# Altium PCB PCB-BL-2.PcbDoc
Units mil, origin at the board's own origin, x right, y up, seen from the top; angles counter-clockwise.
Board outline 3325 x 3850 mil, 4 copper layers (Top Layer, GND Plane 1, GND Plane 2, Bottom Layer), stack 23.756 mil thick; 49 components, 54 nets, 212 pads, 33 vias.
Unrouted connection lines stored in the file: 39.
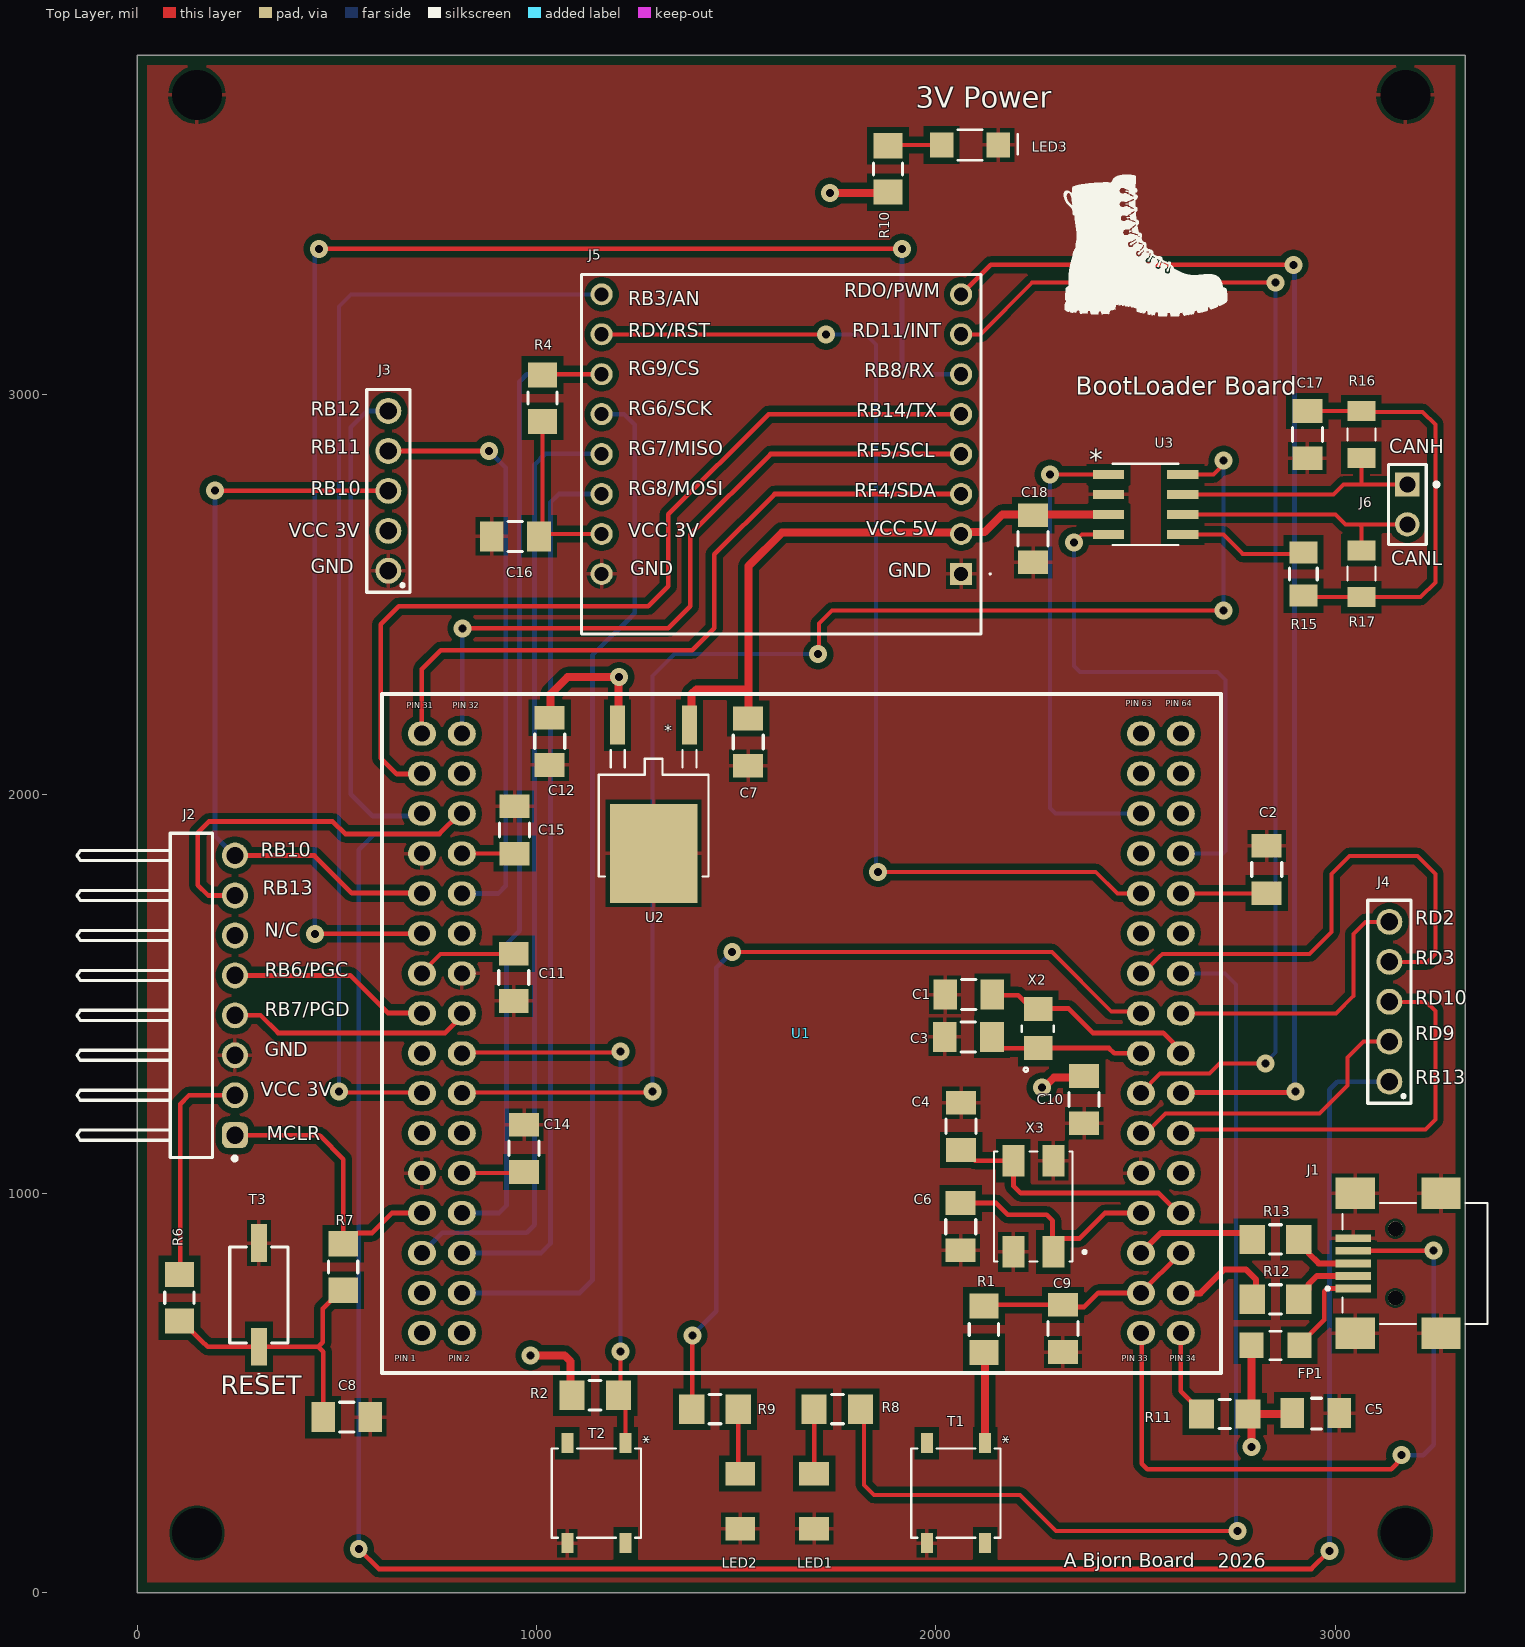
[diagram p0: Top Layer view]
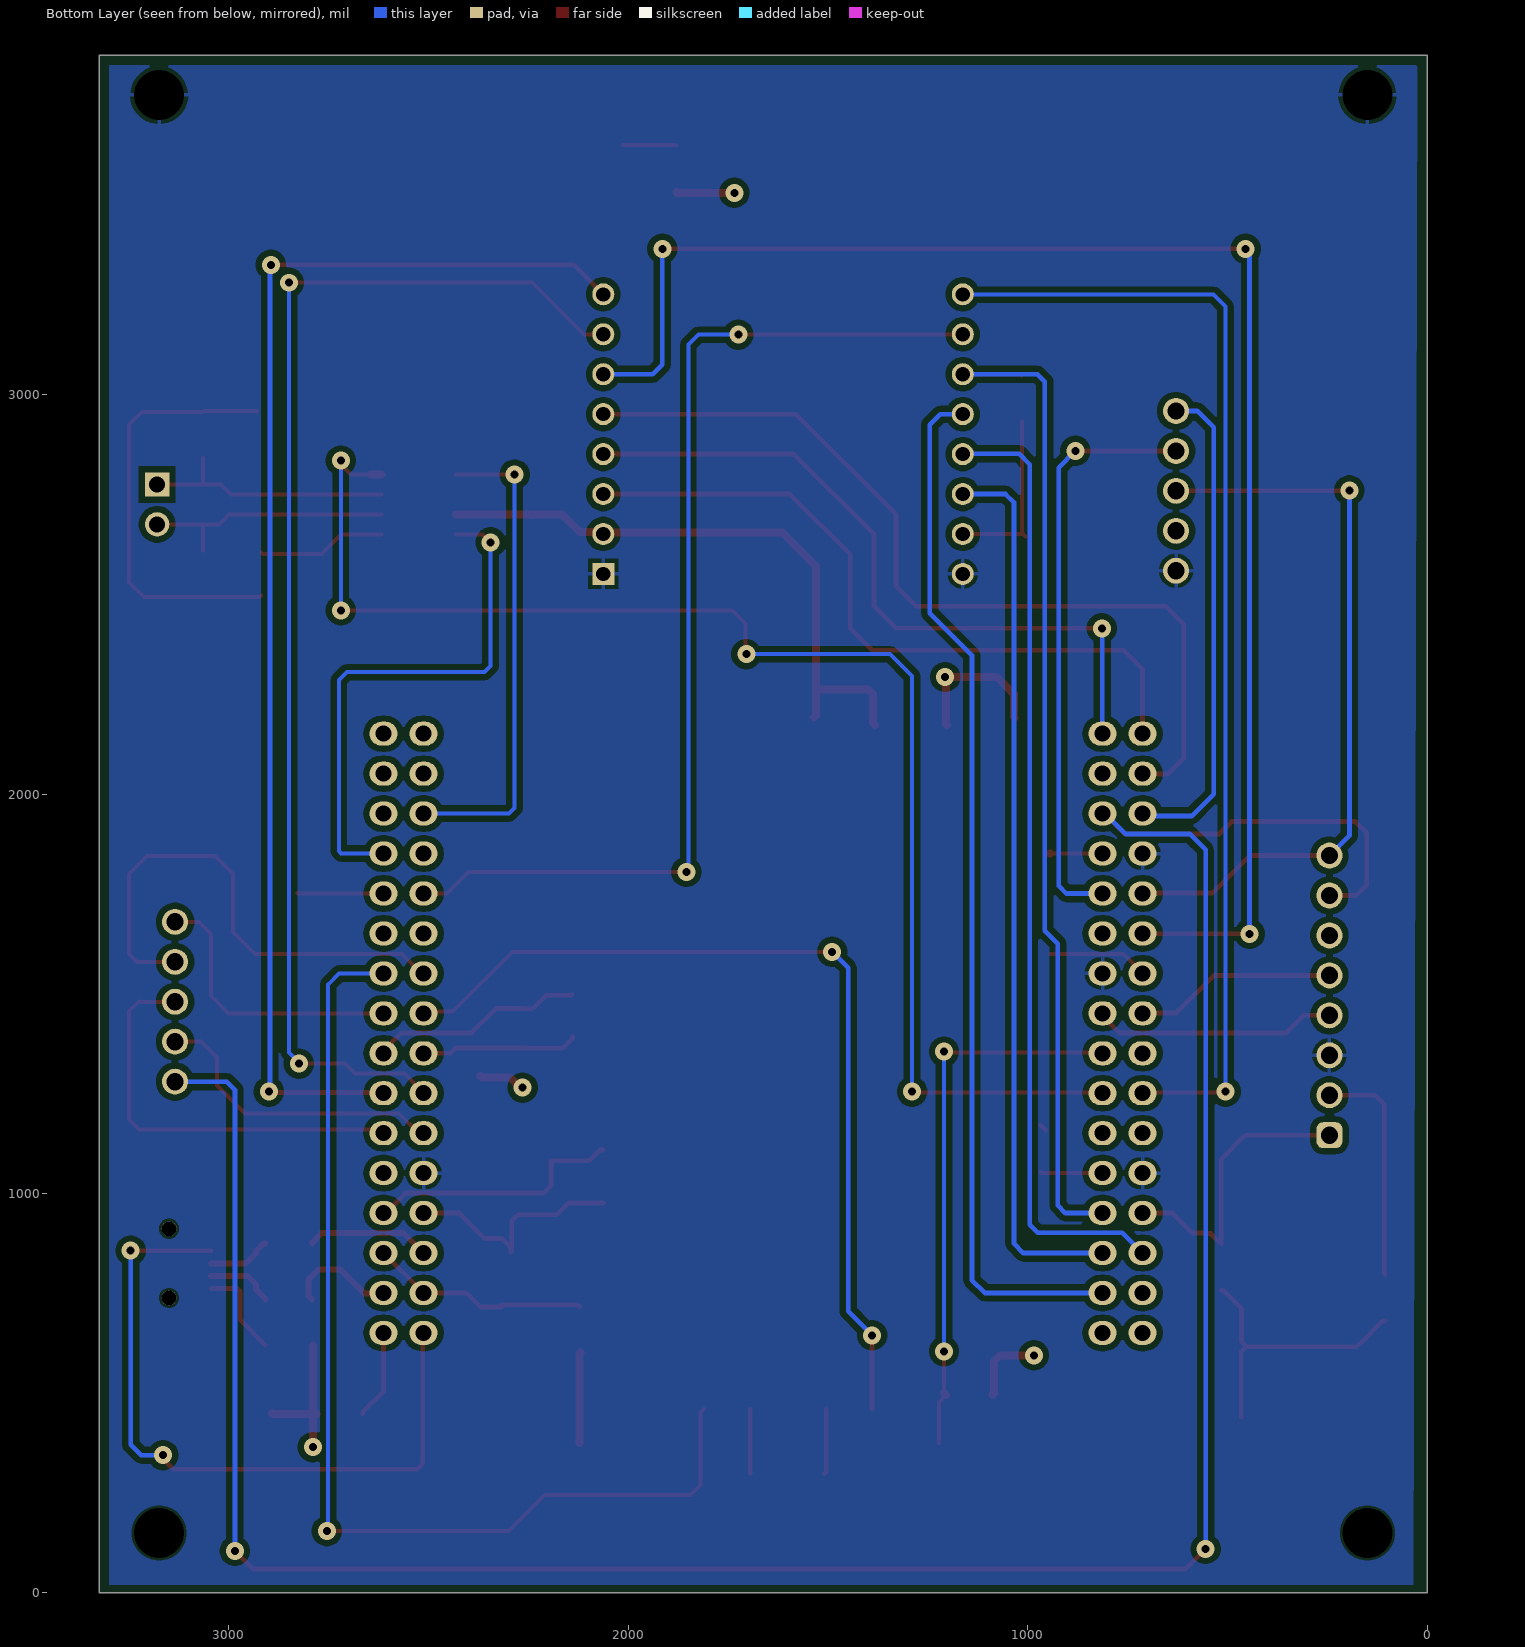
[diagram p1: Bottom Layer view, seen from below]
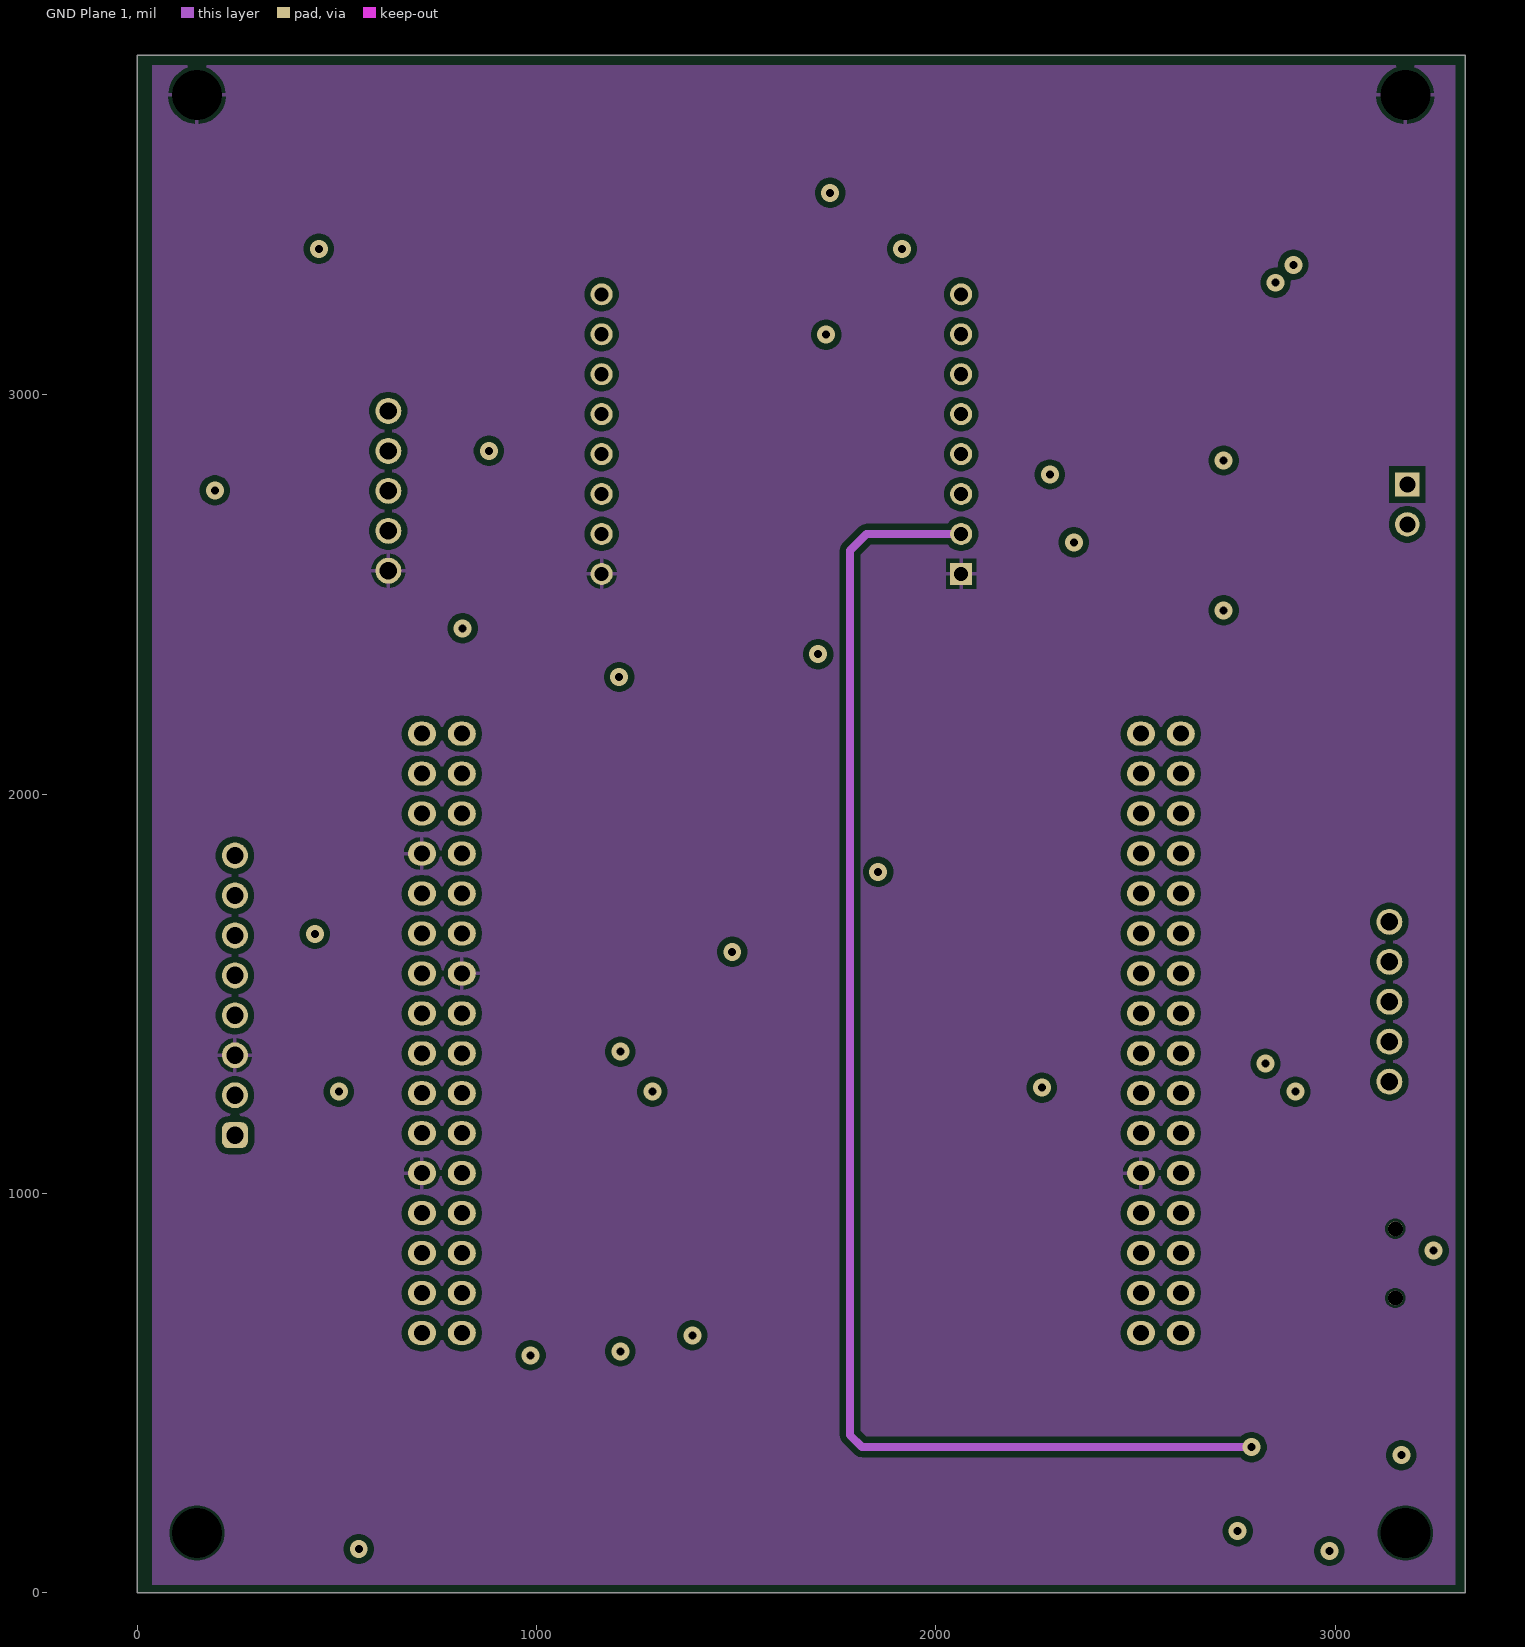
[diagram p2: GND Plane 1]
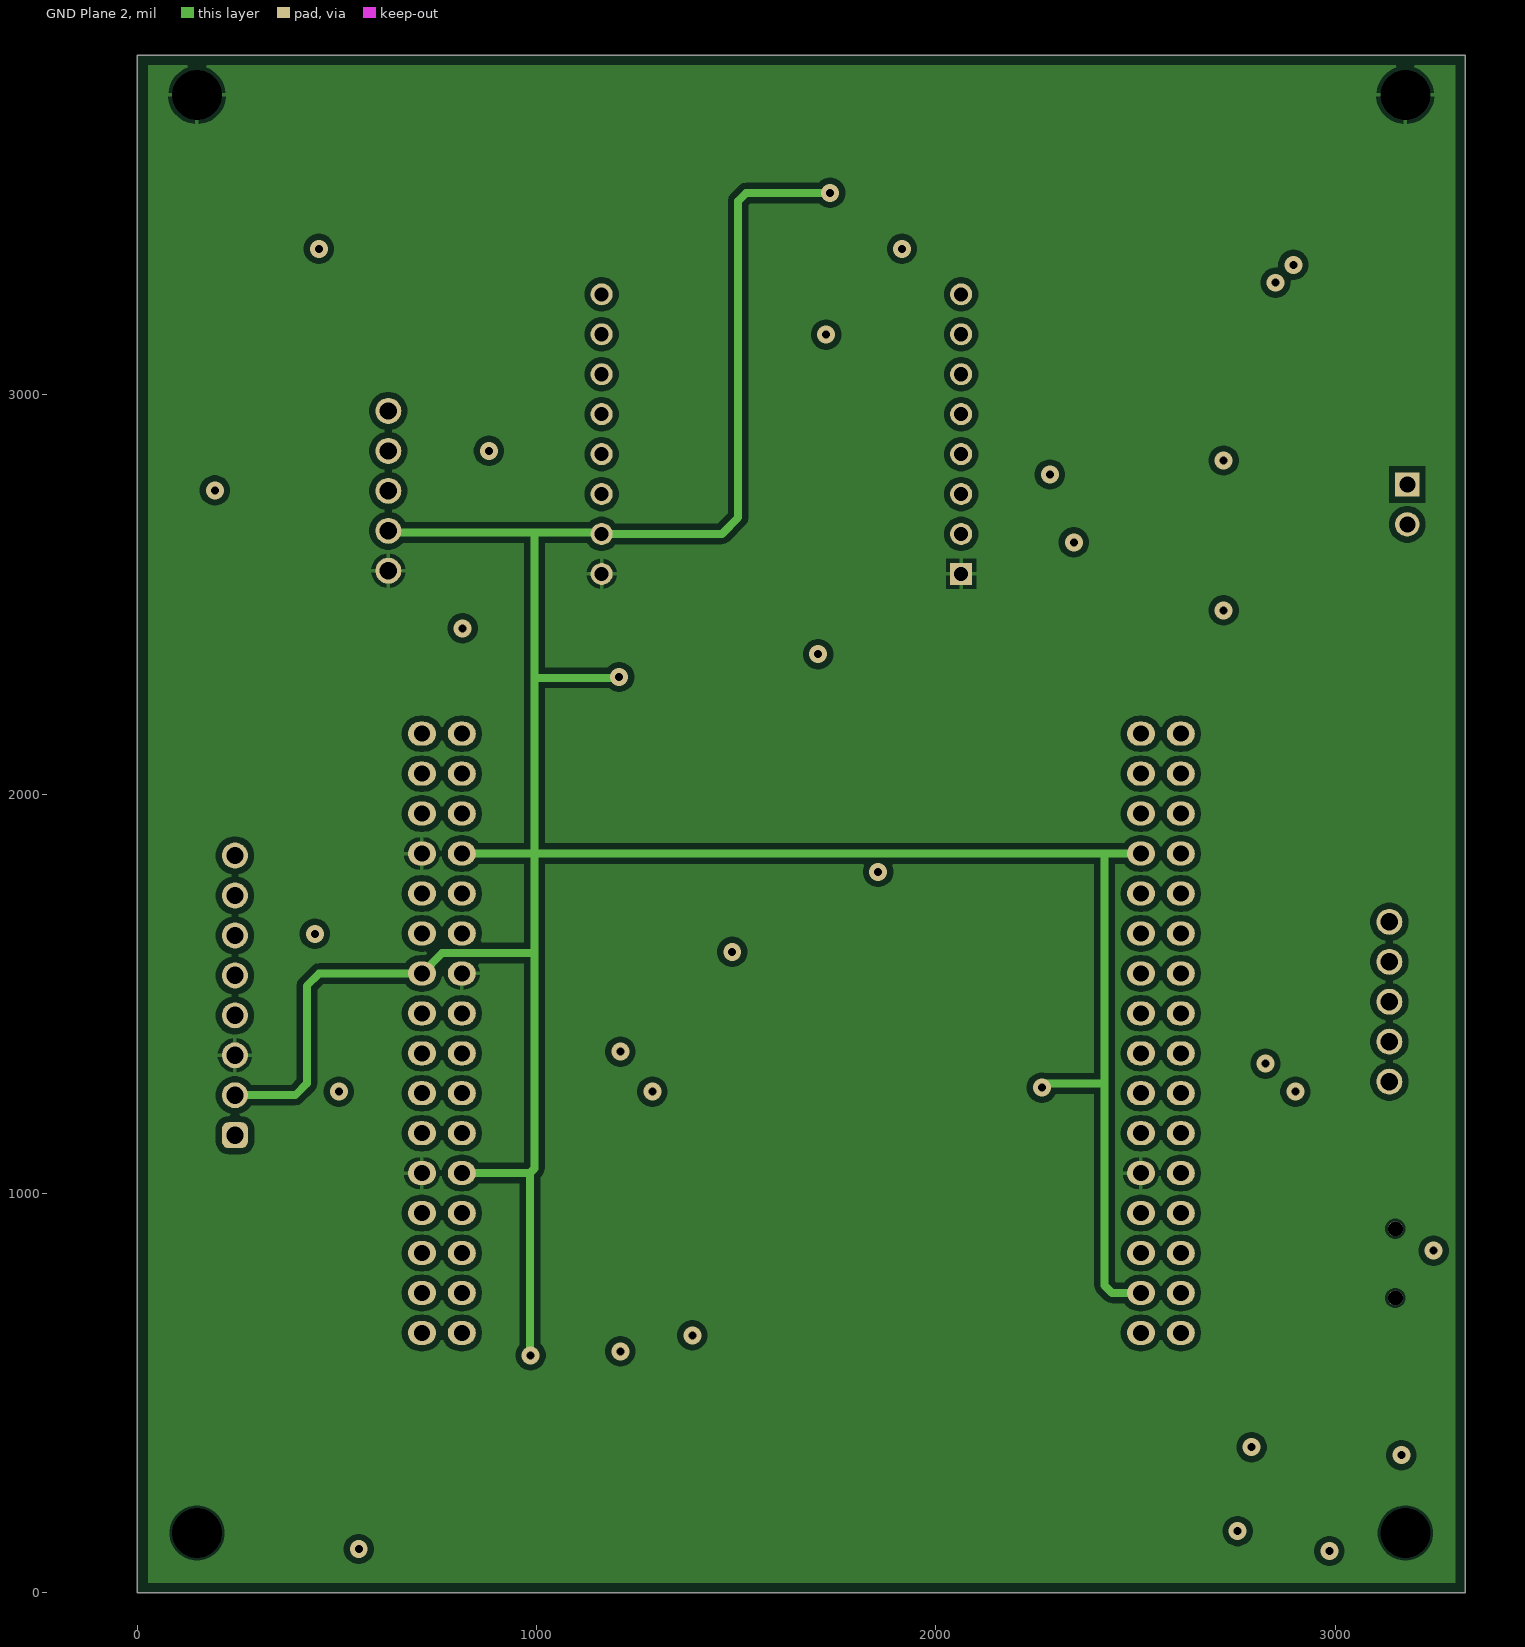
[diagram p3: GND Plane 2]
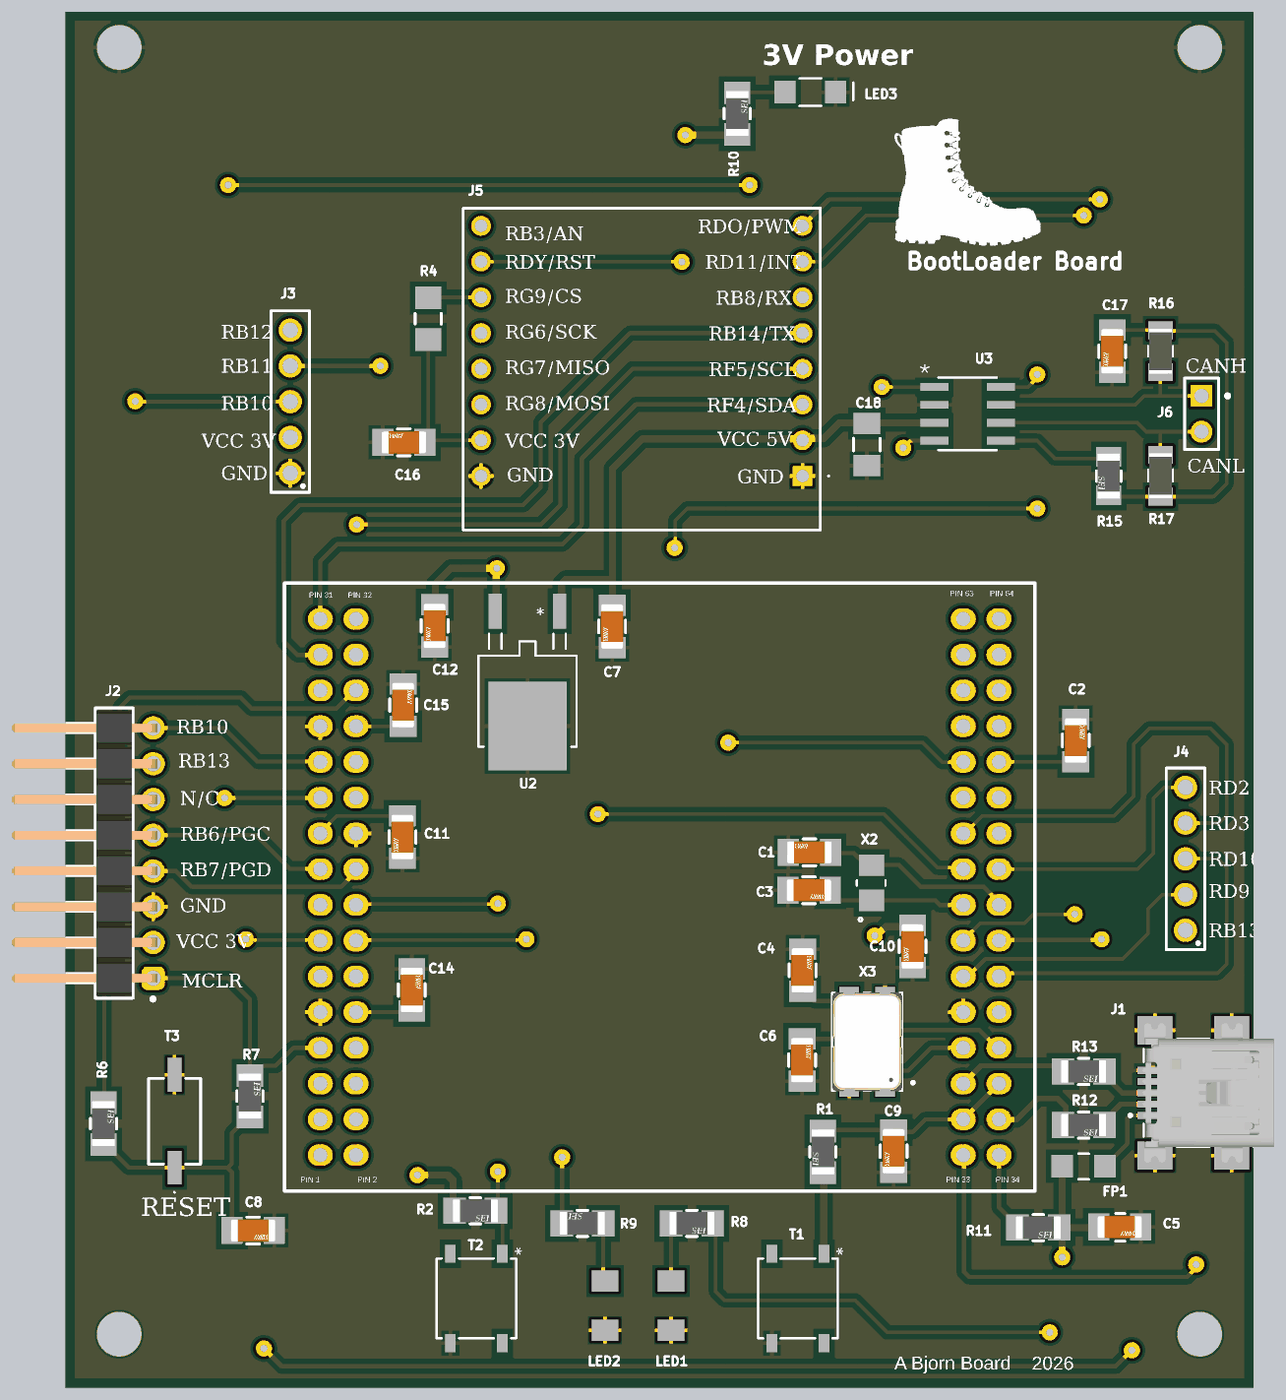
[diagram p4: 3D render of the assembled board from above, using the file's embedded part models]

## Layer stack, top to bottom
Top Solder: solder mask 0.4, Solder Resist, Dk 3.5
Top Layer: signal copper 1.4
Dielectric 2: prepreg 2.8, PP-006, Dk 4.1
GND Plane 1: signal copper 1.378
Dielectric 1: dielectric 12.6, FR-4, Dk 4.8
GND Plane 2: signal copper 1.378
Dielectric 3: prepreg 2.8, PP-006, Dk 4.1
Bottom Layer: signal copper 1.4
Bottom Solder: solder mask 0.4, Solder Resist, Dk 3.5

## Board outline
0,0 0,3850 3325,3850 3325,0

## Design rules (kind name [scope] priority, off if disabled: settings)
Clearance [All] p1: gap=6 ignorepadtopadclearanceinfootprint=FALSE except(8: Arc-SMDPad Track-SMDPad SMDPad-SMDPad; 15: Arc-Fill Arc-Poly Arc-Region Track-Fill Track-Poly Track-Region SMDPad-Fill SMDPad-Poly SMDPad-Region THPad-Fill THPad-Poly THPad-Region Via-Fill Via-Poly Via-Region Fill-Fill Fill-Poly Fill-Region Poly-Poly Poly-Region Region-Region)
DiffPairsRouting [All] p1: maxlimit=10 minlimit=10 mostfreqgap=10 toplayer_minwidth=15 toplayer_maxwidth=15 toplayer_prefwidth=15 midlayer1_minwidth=15 midlayer1_maxwidth=15 midlayer1_prefwidth=15 midlayer2_minwidth=15 midlayer2_maxwidth=15 midlayer2_prefwidth=15 bottomlayer_minwidth=15 bottomlayer_maxwidth=15 bottomlayer_prefwidth=15 maxuncoupledlength=500
MinimumSolderMaskSliver [All] p1: minsoldermaskwidth=5
PolygonConnect [All] p1: connectstyle=Relief reliefconductorwidth=10 reliefentries=4 polygonreliefangle="90 Angle" airgapwidth=10
RoutingVias [All] p1: holewidth=20 width=45 viastyle="Through Hole" minholewidth=20 minwidth=45 maxholewidth=30 maxwidth=70
SilkToSilkClearance [All] p1: silktosilkclearance=6
SilkToSolderMaskClearance [IsPad] p1: minsilkscreentomaskgap=6 clearancetoexposedcopper=TRUE
SolderMaskExpansion [All] p1: expansion=8 istentingtop=FALSE soldermaskfromhole=TRUE
SupplyNets "Schematic Supply Nets_2" [InNet('VCC3_3')] p1: voltage=0.000
SupplyNets "Schematic Supply Nets_1" [InNet('GND')] p2: voltage=0.000
SupplyNets "Schematic Supply Nets" [InNet('VCC5')] p3: voltage=0.000
UnRoutedNet [All] p1: checkbadconnections=TRUE
Width [All] p1: maxlimit=50 minlimit=6 preferedwidth=10
25 further rules are at their usual default settings.

## Classes and differential pairs
net class RD[1..11]: RD1 RD2 RD3 RD4 RD5 RD6 RD7 RD8 RD9 RD10 RD11
differential pair USB-D: +USB-D_P -USB-D_N
differential pair USB: +USB_P -USB_N

## Components (designator, comment, footprint, x,y, rotation, side; value= is the part's Value field where it differs from the comment)
C1 "22pf" FP-1206-L_3_2_0_2-W_1_6_0-IPC_A 2082.09,1498 r180 top
C2 "10uf" FP-1206-L_3_2_0_2-W_1_6_0-IPC_A 2828,1811.09 r90 top
C3 "22pf" FP-1206-L_3_2_0_2-W_1_6_0-IPC_A 2081.09,1392 r0 top
C4 "22pf" FP-1206-L_3_2_0_2-W_1_6_0-IPC_A 2063,1168.09 r90 top
C5 "100nf" FP-1206-L_3_2_0_2-W_1_6_0-IPC_A 2950.91,450 r0 top
C6 "22pf" FP-1206-L_3_2_0_2-W_1_6_0-IPC_A 2062,917 r90 top
C7 "10uf" FP-1206-L_3_2_0_2-W_1_6_0-IPC_A 1530,2130 r270 top
C8 "100nf" FP-1206-L_3_2_0_2-W_1_6_0-IPC_A 525,440 r0 top
C9 "100nf" FP-1206-L_3_2_0_2-W_1_6_0-IPC_A 2318,662.09 r270 top
C10 "100nf" FP-1206-L_3_2_0_2-W_1_6_0-IPC_A 2371,1235 r270 top
C11 "100nf" FP-1206-L_3_2_0_2-W_1_6_0-IPC_A 943,1541 r270 top
C12 "10uf" FP-1206-L_3_2_0_2-W_1_6_0-IPC_A 1033,2131.91 r270 top
C14 "100nf" FP-1206-L_3_2_0_2-W_1_6_0-IPC_A 969,1113 r90 top
C15 "100nf" FP-1206-L_3_2_0_2-W_1_6_0-IPC_A 945,1910 r90 top
C16 "2.2uf" FP-1206-L_3_2_0_2-W_1_6_0-IPC_A 947,2645 r180 top
C17 "4700pF" FP-1206-L_3_2_0_2-W_1_6_0-IPC_A 2930,2900 r270 top
C18 "100nf" FP-1206-L_3_2_0_2-W_1_6_0-IPC_A 2243,2639 r270 top
FP1 "HI1206P121R-10" HI1206P121R-10_LRD 2850,620 r0 top
J1 "USB Conn" AMPHENOL_10033526-N3212MLF 3150,825 r90 top
J2 "Programmer Port" 61300811021 136,1496 r270 top
J3 "1-5" 61300511121 629,2759 r90 top
J4 "6-10" 61300511121 3135,1480 r90 top
J5 "MIKROE-4247" MIKROE4247 2063,2551 r90 top
J6 "68000-102HLF" AMPH-68000-102HLF_V 3180,2725 r270 top
LED1 "LTST-C150EKT" "test led" 1695,230 r90 top
LED2 "LTST-C150EKT" "test led" 1510,230 r90 top
LED3 "LTST-C230KGKT" LED_LTST-C230KGKT_LTO 2085,3625 r180 top
R1 "4K7" FP-RMCF1206-IPC_A 2120,660 r270 top
R2 "4K7" FP-RMCF1206-IPC_A 1146.91,495 r0 top
R4 "100k" FP-RMCF1206-IPC_A 1015,2991 r90 top
R6 "10k" FP-RMCF1206-IPC_A 106,739.09 r90 top
R7 "1k" FP-RMCF1206-IPC_A 516,815.91 r90 top
R8 "4K7" FP-RMCF1206-IPC_A 1753.09,460 r0 top
R9 "4K7" FP-RMCF1206-IPC_A 1446.91,460 r180 top
R10 "470" FP-RMCF1206-IPC_A 1880,3565 r90 top
R11 "220" FP-RMCF1206-IPC_A 2722.91,448 r0 top
R12 "27" FP-RMCF1206-IPC_A 2850,735 r0 top
R13 "27" FP-RMCF1206-IPC_A 2850,885 r0 top
R15 "300" FP-RMCF1206-IPC_B 2920,2550.84 r270 top
R16 "60" RESC3116X60N 3065,2900 r270 top
R17 "60" RESC3116X60N 3065,2551.54 r270 top
T1 "PTS526 SM15 SMTR2 LFS" "SON4_PTS526 SM15 SMTR2 LFS_CNK" 2050,250 r270 top
T2 "PTS526 SM15 SMTR2 LFS" "SON4_PTS526 SM15 SMTR2 LFS_CNK" 1150,250 r270 top
T3 "GSPTS004602" GSPTS004602 305,746 r90 top
U1 "PIC32MX534F064H-I/PT - Clamshell" MCU_64BIT_CLAMSHELL_2x16_2ROWS_1900MILFAR 713,2151 r0 top locked
U2 "LD29080DT33R" DPAK_STM 1293,1921 r180 top
U3 "MCP2561-E/SN" SOIC8-N_MC_MCH 2525,2725 r0 top
X2 "32.7680KHz" XTAL_FC-135_EPS 2256,1413 r90 top
X3 "407F39E008M0000" XTAL_407F39E008M0000 2244,967.83 r180 top

## Footprints (in the part's own frame and the unit in brackets; to place one, negate y for a bottom-side part, rotate by r counter-clockwise, add the part's x,y. Pads: shape width x height; smd on the part's side, far side on the other; paste and mask are expansions set on the pad)
61300511121 [mm]
  round 1.65 hole 1.1: 1(-5.08,0) 2(-2.54,0) 3(0,0) 4(2.54,0) 5(5.08,0)
  silkscreen extent -6.45,-1.37 6.45,1.37
61300811021 [mm] "Pin Header, pitch 2.54 mm, THT, Angled, single row, 8p"
  rrect50% 1.65x1.65 hole 1.1: 1(8.89,2.77)
  round 1.65 hole 1.1: 2(6.35,2.77) 3(3.81,2.77) 4(1.27,2.77) 5(-1.27,2.77) 6(-3.81,2.77) 7(-6.35,2.77) 8(-8.89,2.77)
  silkscreen extent -10.31,-7.27 10.49,2.88, body extent -10.16,-7.27 10.16,3.09, height 2.58
AMPH-68000-102HLF_V [mm] "THD, 2-Leads, Body 5.08x2.41mm, Pitch 2.54mm"
  rect 1.55x1.55 hole 1.02: 1(-1.27,0)
  round 1.55 hole 1.02: 2(1.27,0)
  silkscreen extent -2.54,-1.2 2.54,1.98, body extent -2.54,-1.2 2.54,1.2, height 8.38
AMPHENOL_10033526-N3212MLF [mm]
  rect 0.5x2.25 smd mask+0.076: 1(-1.6,2.675) 2(-0.8,2.675) 3(0,2.675) 4(0.8,2.675) 5(1.6,2.675)
  rect 2x2.5 smd: S1(-4.45,2.55) S2(4.45,2.55) S3(-4.45,-2.9) S4(4.45,-2.9)
  round 0.95 hole 0.95 unplated: ""(-2.2,0) ""(2.2,0)
  silkscreen extent -3.85,-5.85 3.85,4.4, body extent -4.95,-5.89 4.95,3.44, height 3.95
DPAK_STM [mil]
  rect 36.97x97.56 smd paste+0 mask+0: 1(-90,-251.5) 2(90,-251.5)
  rect 219x248 smd paste+0 mask+0: 3(0,69.5)
  silkscreen extent -138,-189 138,128
FP-1206-L_3_2_0_2-W_1_6_0-IPC_A [mil]
  rect 59.24x75.05 smd paste+0 mask+0: 1(-59.09,0) 2(59.09,0)
  silkscreen extent -18,-38 18,38, body extent -108,-57 108,57, height 10
FP-RMCF1206-IPC_A [mil]
  rect 63.14x73.16 smd paste+0 mask+0: 1(-58.09,0) 2(58.1,0)
  silkscreen extent -15,-37 15,37, body extent -109,-56 109,56, height 10
FP-RMCF1206-IPC_B [mil]
  rect 55.27x69.22 smd paste+0 mask+0: 1(-54.16,0) 2(54.16,0)
  silkscreen extent -15,-35 15,35, body extent -92,-44 92,44, height 10
GSPTS004602 [mm]
  rect 2.4x1 smd: 1(-3.3,0) 2(3.3,0)
  silkscreen extent -5.1,-1.85 3.05,1.85
HI1206P121R-10_LRD [mil]
  rect 60x63 smd paste+0 mask+0: 1(-60,0) 2(60,0)
  silkscreen extent -15,-36 15,35
LED_LTST-C230KGKT_LTO [mil]
  rect 59x63 smd paste+0 mask+0: 1(-71,0) 2(71,0)
  silkscreen extent -120,-39 30,39
MCU_64BIT_CLAMSHELL_2x16_2ROWS_1900MILFAR [mil]
  oval 70x60 hole 40: 1(0,-1500) 2(100,-1500) 3(0,-1400) 4(100,-1400) 5(0,-1300) 6(100,-1300) 7(0,-1200) 8(100,-1200) 9(0,-1100) 10(100,-1100) 11(0,-1000) 12(100,-1000) 13(0,-900) 14(100,-900) 15(0,-800) 16(100,-800) 17(0,-700) 18(100,-700) 19(0,-600) 20(100,-600) 21(0,-500) 22(100,-500) 23(0,-400) 24(100,-400) 25(0,-300) 26(100,-300) 27(0,-200) 28(100,-200) 29(0,-100) 30(100,-100) 31(0,0) 32(100,0) 33(1800,-1500) 34(1900,-1500) 35(1800,-1400) 36(1900,-1400) 37(1800,-1300) 38(1900,-1300) 39(1800,-1200) 40(1900,-1200) 41(1800,-1100) 42(1900,-1100) 43(1800,-1000) 44(1900,-1000) 45(1800,-900) 46(1900,-900) 47(1800,-800) 48(1900,-800) 49(1800,-700) 50(1900,-700) 51(1800,-600) 52(1900,-600) 53(1800,-500) 54(1900,-500) 55(1800,-400) 56(1900,-400) 57(1800,-300) 58(1900,-300) 59(1800,-200) 60(1900,-200) 61(1800,-100) 62(1900,-100) 63(1800,0) 64(1900,0)
  silkscreen extent -100,-1600 2000,100
MIKROE4247 [mm]
  rect 1.4x1.4 hole 0.9: 1(0,0)
  round 1.4 hole 0.9: 2(2.54,0) 3(5.08,0) 4(7.62,0) 5(10.16,0) 6(12.7,0) 7(15.24,0) 8(17.78,0) 9(17.78,22.86) 10(15.24,22.86) 11(12.7,22.86) 12(10.16,22.86) 13(7.62,22.86) 14(5.08,22.86) 15(2.54,22.86) 16(0,22.86)
  silkscreen extent -3.83,-1.9 19.03,24.13
RESC3116X60N [mm]
  rect 1.27x1.77 smd: 1(-1.485,0) 2(1.485,0)
  silkscreen extent -0.38,-0.89 0.38,0.89, body extent -1.6,-0.8 1.6,0.8, height 0.6
SOIC8-N_MC_MCH [mil]
  rect 78x22 smd paste+0 mask+0: 1(-93,75) 2(-93,25) 3(-93,-25) 4(-93,-75) 5(93,-75) 6(93,-25) 7(93,25) 8(93,75)
  silkscreen extent -82,-102 82,102
"SON4_PTS526 SM15 SMTR2 LFS_CNK" [mil]
  rect 50x30 smd paste+0 mask+0: 1(-125.1,72.83) 2(-125.1,-72.83) 3(125.1,-72.83) 4(125.1,72.83)
  silkscreen extent -112,-112 112,112
"test led" [mm]
  rect 1.5x1.905 smd: 1(-1.75,0) 2(1.75,0)
  body extent -1.6,-0.8 1.6,0.8, height 1.1
XTAL_407F39E008M0000 [mm]
  rect 1.4x2 smd paste+0 mask+0.102: 1(-1.27,2.9) 2(-1.27,-2.9) 3(1.27,-2.9) 4(1.27,2.9)
  silkscreen extent -3.35,-3.5 2.5,3.5, body extent -2.5,-3.5 2.5,3.5, height 1.3
XTAL_FC-135_EPS [mil]
  rect 60x71 smd paste+0 mask+0: 1(-49.21,0) 2(49.21,0)
  silkscreen extent -108,-39 7,41

## Part data
C1 C2 C3 C4 C5 C6 C7 C8 C9 C10 C11 C12 C14 C15 C16 C17 C18: library part CMP-04427-012685-1, "Automotive Ceramic Capacitor, 1206, 100nF, 10%, X7R, 15%, 200V", Capacitance=100nF, Case Code (Imperial)=1206, Case Code (Metric)=3216, Dielectric=X7R, Max Operating Temperature=125°C, Min Operating Temperature=-55°C, Package Quantity=2000, Tolerance=10%, Voltage Rating (DC)=200V, Case/Package=1206, Depth=1.6mm, Height=1.52mm, Lead Free="Lead Free", Length=3.2mm, Packaging="Tape and Reel", Termination=SMD/SMT, Width=1.6mm
FP1: "Description", Manufacturer_Name=Laird, Copyright="Copyright (C) 2025 Ultra Librarian. All rights reserved.", Manufacturer_Part_Number=HI1206P121R-10, RefDes=RefDes, Type=Type
J1: library part 10033526-N3212MLF, "Right Angle Surface Mount Mount Female Type B USB Connector", Package=None, Check_prices=https://www.snapeda.com/parts/10033526-N3212MLF/Amphenol/view-part/?ref=eda, MF="Amphenol ICC", MP=10033526-N3212MLF, SnapEDA_Link=https://www.snapeda.com/parts/10033526-N3212MLF/Amphenol/view-part/?ref=snap
J2: library part CMP-1502-01075-4, "THT Angled Pin Header WR-PHD, Pitch 2.54 mm, Single Row, 8 pins", Color=Black, Contact Resistance=20mΩ, Current Rating=3A, Operating Supply Voltage=250V, Connector Type="Male Pin", Contact Material=Copper, Contact Mating Length=5.9944mm, Contact Plating=Gold, Gender=Male, Lead Pitch=2.54mm, Mount="Through Hole", Number of Contacts=8, Number of Pins=8, Number of Positions=8, Number of Rows=1, Packaging=Bulk, Pitch=2.54mm, RoHS=Compliant, Termination=Solder
J3 J4: library part 6130XX11121_61300511121, Package=None, Availability=Unavailable, MF="{'manufacturer': u'W\xfcrth Elektronik'}", MP=61300511121, Price=None
J5: "Sockets & Adapters SOCKET mikroBUS 16 TH", Manufacturer_Name=Mikroe, Mouser Part Number=932-MIKROE-4247, Datasheet Link=https://download.mikroe.com/documents/mikrobu_socket/SOCKET%20mikroBUS%2016%20TH.pdf, Geometry.Height=11.6mm, Manufacturer_Part_Number=MIKROE-4247, Mouser Price/Stock=https://www.mouser.co.uk/ProductDetail/Mikroe/MIKROE-4247?qs=zW32dvEIR3v60RwxHCFyew%3D%3D
J6: library part CMP-2000-05666-1, "Male Header, Pitch 2.54 mm, 1 x 2 Position, Height 8.38 mm, Tail Length 2.41 mm, RoHS, Bulk", Current Rating=3A, Flammability Rating=UL94V-0, Insulation Resistance=5000MOhms, Manufacturer=FCI, Operating Temperature Range=-65Cto+125C, Package Description="Male Header, Pitch 2.54 mm, 1 x 2 Position, Height 8.38 mm, Tail Length 2.41 mm", Voltage Rating=1.5kV, Brand=FCI, Contact Gender=Pin(Male), Contact Material=PhosphorBronze, Contact Plating=Gold/GTX, Datasheet URL=https://datasheet.ciiva.com/5149/68000-274228-5149165.pdf, Datasheet Version="Rev. F, 04/2006", Factory Pack Quantity=100, Housing Material=Thermoplastic, Manufacturer URL=http://www.amphenol.com/, Mating Post Length=5.84mm, Mounting Angle=Vertical, Mounting Style=ThroughHole, Mounting Technology=ThroughHole, Number of Positions=2, Number of Positions / Contacts=2, Number of Rows=1, Package Reference=68000-102HLF, Packaging=Bulk, Pitch=2.54mm, Product Category=Headers&WireHousings, Product Type=Headers, RoHS=Details, Series=68000, Termination Post Length=2.41mm, Termination Style=ThroughHole, Type=Unshrouded
LED1 LED2: library part "test led", "Description", Manufacturer_Name=LITE-ON, Manufacturer_Part_Number=LTST-C150GKT, Copyright="Copyright (C) 2025 Ultra Librarian. All rights reserved."
LED3: "LED GREEN CLEAR CHIP SMD", Manufacturer_Name=LITE-ON, Copyright="Copyright (C) 2025 Ultra Librarian. All rights reserved.", Manufacturer_Part_Number=LTST-C230KGKT
R1 R2 R4 R6 R7 R8 R9 R10 R11 R12 R13: library part CMP-26527-005426-1, "4.7kΩ ±5% 0.25W 1206 Thick Film Chip Resistor AEC-Q200 compliant", Case Code (Imperial)=1206, Case Code (Metric)=3216, Max Operating Temperature=155°C, Max Power Dissipation=250mW, Min Operating Temperature=-55°C, Resistance=4.7kR, Resistor Type="Thick Film", Temperature Coefficient=200ppm/°C, Tolerance=5%, Case/Package=1206, Construction=Rectangular, Contact Plating=Tin, Depth=1.6mm, Features="Automotive AEC-Q200", Height=0.028inch, Lead Free="Lead Free", Length=3.2mm, Military Standard=Not, Mount="Surface Mount", Number of Terminations=2, Packaging="Tape and Reel", Power Rating=250mW, Radiation Hardening=No, RoHS Compliant=Yes, Series=RMCF, Size Code=1206, Width=0.063inch
R15: library part CMP-26527-001830-1, "300Ω ±5% 0.25W 1206 Thick Film Chip Resistor AEC-Q200 compliant", Case Code (Imperial)=1206, Case Code (Metric)=3216, Max Operating Temperature=155°C, Max Power Dissipation=250mW, Min Operating Temperature=-55°C, Resistance=300R, Resistor Type="Thick Film", Temperature Coefficient=200ppm/°C, Tolerance=5%, Case/Package=1206, Construction=Rectangular, Contact Plating=Tin, Depth=1.6mm, Features="Automotive AEC-Q200", Height=0.028inch, Lead Free="Lead Free", Length=3.2mm, Military Standard=Not, Mount="Surface Mount", Number of Terminations=2, Packaging="Tape and Reel", Radiation Hardening=No, RoHS Compliant=Yes, Series=RMCF, Width=0.063inch
R16 R17: library part CRCW120660R0KNEAIF, "60 Ohms Â±10% 0.25W, 1/4W Chip Resistor 1206 (3216 Metric) Automotive AEC-Q200, Pulse Withstanding Thick Film", Package="3116 Vishay", Check_prices=https://www.snapeda.com/parts/CRCW120660R0KNEAIF/Vishay+Dale/view-part/?ref=eda, MF="Vishay Dale", MP=CRCW120660R0KNEAIF, SnapEDA_Link=https://www.snapeda.com/parts/CRCW120660R0KNEAIF/Vishay+Dale/view-part/?ref=snap
T1 T2: "Description", Manufacturer_Name="C&K Components", Copyright="Copyright (C) 2026 Ultra Librarian. All rights reserved.", Manufacturer_Part_Number="PTS526 SM15 SMTR2 LFS", RefDes=RefDes, Type=Type
T3: library part GSPTS004602_1, "Tactile Switch SPST-NO Top Actuated Surface Mount 0.05A,12VDC ,-40C ~ 90C,\"PTS636SK25FSMTR LFS\"", Manufacturer_Name="C & K COMPONENTS", Datasheet Link=https://www.ckswitches.com/media/2779/pts636.pdf, Geometry.Height=2.7mm, Manufacturer_Part_Number=GSPTS004602
U1: library part PIC32MX534F064H-IPT, "Description", Manufacturer_Name=Microchip, Manufacturer_Part_Number=PIC32MX534F064H-I/PT, Copyright="Copyright (C) 2025 Ultra Librarian. All rights reserved.", RefDes=RefDes, Type=Type
U2: "800 mA fixed and adjustable output very low drop voltage regulator", Manufacturer_Name=STMicroelectronics, Copyright="Copyright (C) 2025 Ultra Librarian. All rights reserved.", Manufacturer_Part_Number=LD29080DT33R, RefDes=RefDes, Type=Type
U3: library part MCP2561-ESN, "Description", Manufacturer_Name=Microchip, Copyright="Copyright (C) 2025 Ultra Librarian. All rights reserved.", Manufacturer_Part_Number=MCP2561-E/SN, RefDes=RefDes, Type=Type
X2: library part "FC-135 32.7680KA-A5", "Description", Manufacturer_Name=Epson, Copyright="Copyright (C) 2025 Ultra Librarian. All rights reserved.", Manufacturer_Part_Number="FC-135 32.7680KA-A5"
X3: library part CMP-003-00030-1, "8 MHz Â±30ppm Crystal 20pF 60 Ohms 4-SMD, No Lead", Case/Package="NON STANDARD-4 CTS Components", Check_prices=https://www.snapeda.com/parts/407F39E008M0000/CTS-Frequency+Controls/view-part/?ref=eda, Component Type=Standard, Design Item ID=407F39E008M0000, MF="CTS-Frequency Controls", MP=407F39E008M0000, Pins=4, SnapEDA_Link=https://www.snapeda.com/parts/407F39E008M0000/CTS-Frequency+Controls/view-part/?ref=snap, Source=407F39E008M0000.SchLib

## Free pads (board coordinates)
  round 60 hole 125: MH(150,150) MH(150,3750) MH(3175,150) MH(3175,3750)

## Via types
v1: diameter 45/45/45/45 (per signal layer), hole 20, Top Layer to Bottom Layer, 33 vias

## Nets (pads, with @x,y where several pads share a name; then routed paths per layer and width w, separated by ;. In a path a pad name is that pad's centre, name@x,y a point inside that pad or via, vN(x,y) a via of type N, cw(c..) or ccw(c..) an arc to the next point about the centre after c; other vN are vias at no path point)
C1RX: U1.58 U3.4 | length 1342.4
  Top Layer w10: v1(2345,2630) 2365,2650 U3.4
  Bottom Layer w10: v1(2345,2630) 2345,2320 2360,2305 2705,2305 2725,2285 2725,1856.86 2719.14,1851 U1.58
C1TX: U1.59 U3.1 | length 1215.8
  Top Layer w10: v1(2285,2800) U3.1
  Bottom Layer w10: v1(2285,2800) 2285,1965 2299,1951 U1.59
GND: C1.2 C2.2 C3.1 C4.2 C5.2 C6.1 C7.2 C8.2 C9.2 C10.2 C11.2 C12.2 C14.2 C15.2 C16.2 C17.2 C18.2 J1.5 J1.S1 J1.S2 J1.S3 J1.S4 J2.3 J3.1 J5.1 J5.16 LED1.1 LED2.1 LED3.1 pad.MH@150,3750 pad.MH@3175,3750 T1.3 T2.3 T3.2 U1.9 U1.20 U1.25 U1.41 U2.3 U3.2 X3.2 X3.4 | length 33.2
  Top Layer w11.81: J3.1 J3.1@633,2555 ; U1.9 U1.9@713,1053 ; C14.2@954.91,1158 C14.2 ; J5.16@1159,2555 J5.16
MCLR#: J2.1 R7.2 U1.7 | length 736.7
  Top Layer w11.81: J2.1 455,1146 457,1144 458,1144 516,1086 R7.2 541.66,899.66 552.26,899.66 553.59,901 588,901 638,951 U1.7
NetC1_1: C1.1 U1.48 X2.2 | length 537.5
  Top Layer w11.81: C1.1 2143.17,1496 2206.21,1496 2240,1462.21 X2.2 2256.79,1463 2332,1463 2393,1402 2569,1402 2613,1358 U1.48
NetC2_1: C2.1 U1.56 | length 215.4
  Top Layer w10: U1.56 2827,1751 C2.1
NetC3_2: C3.2 U1.47 X2.1 | length 392.6
  Top Layer w11.81: C3.2 2140.17,1387.5 2163.89,1363.79 X2.1 2256.21,1364 2433,1364 2446,1351 U1.47
NetC4_1: C4.1 U1.40 X3.3 | length 652.4
  Top Layer w11.81: C4.1 2070.9,1109 2097.9,1082 X3.3 2194,1018.92 2211.92,1001 2558,1001 2608,951 U1.40
NetC6_2: C6.2 U1.39 X3.1 | length 593.7
  Top Layer w11.81: C6.2 2150.91,976.09 2180,947 2277,947 2292,932 2292,855.65 X3.1 2294,865.46 2315.65,887.12 2359.12,887.12 2423,951 U1.39
NetC8_1: C8.1 R6.1 R7.1 T3.1 | length 726.1
  Top Layer w11.81: R6.1 111.01,681 168.01,624 169.51,624 177.44,616.08 T3.1 453.08,616.08 ; C8.1 465.91,603.25 453.08,616.08 ; R7.1 510.99,757.81 465,711.82 465,628 453.08,616.08
NetC17_1: C17.1 R15.2 R16.1 R17.2 | length 1075.9
  Top Layer w10: R15.2 2923.61,2493.07 R17.2 3213.07,2493.07 3250,2530 3250,2925 3218.07,2956.93 3065,2956.93 3062.84,2959.09 C17.1
NetFP1_2: FP1.2 J1.1 | length 236.3
  Top Layer w11.81: FP1.2 2910,621.5 2972,683.5 2972,755 2979.01,762.01 J1.1
NetJ6_1: J6.1 R16.2 U3.7 | length 638.9
  Top Layer w10: U3.7 2995,2750 3020,2775 3065,2775 ; R16.2 3065,2775 ; J6.1 3065,2775
NetJ6_2: J6.2 R17.1 U3.6 | length 639.4
  Top Layer w10: U3.6 3000,2700 3025,2675 3060,2675 ; R17.1 3065,2670 3060,2675 ; J6.2 3060,2675
NetLED1_2: LED1.2 R8.1 | length 161.1
  Top Layer w11.81: LED1.2 R8.1
NetLED2_2: LED2.2 R9.1 | length 163.2
  Top Layer w11.81: R9.1 1505,303.9 LED2.2
NetLED3_2: LED3.2 R10.2 | length 134.8
  Top Layer w10: R10.2 1881.91,3625 LED3.2
NetR1_2: R1.2 T1.1 | length 228
  Top Layer w20: R1.2 2122.83,599.07 T1.1
NetR15_1: R15.1 U3.5 | length 325.7
  Top Layer w10: U3.5 2720,2650 2767.69,2602.31 2767.69,2600.33 2915.33,2600.33 R15.1
PB0/T2: R2.2 T2.1 U1.16 | length 1388
  Top Layer w10: U1.16 815,1353 1208,1353 v1(1210,1355) ; R2.2 1222.83,477.17 T2.1 ; R2.2@1210,500 v1(1210,605)
  Top Layer w20: R2.2 R2.2@1210,500
  Bottom Layer w10: v1(1210,605) v1(1210,1355)
RB2: U1.14 U3.8 | length 3558.2
  Top Layer w10: U1.14 815,1253 1288,1253 v1(1290,1255) ; v1(1705,2350) 1706.7,2351.7 1706.7,2426.7 1740,2460 v1(2720,2460) ; U3.8@2646,2800 2694.9,2800 2701.97,2807.07 2701.97,2807.5 2720,2825.53 v1(2720,2835)
  Top Layer w20: U3.8 U3.8@2646,2800
  Bottom Layer w10: v1(1290,1255) 1290,2295 1345,2350 v1(1705,2350) ; v1(2720,2460) v1(2720,2835)
RB3/AN: J5.9 U1.13 | length 2845.5
  Top Layer w10: v1(505,1255) 507,1253 711,1253 U1.13
  Bottom Layer w10: v1(505,1255) 505,3220 535,3250 1162,3250 J5.9
RB4/T1: U1.12
RB6/PGC: J2.5 U1.17 | length 507.3
  Top Layer w11.81: J2.5 534,1546 628,1452 712,1452 U1.17
RB7/PGD: J2.4 U1.18 | length 610.6
  Top Layer w11.81: J2.4 309,1446 353,1402 771,1402 813,1444 U1.18
RB8/RX: J5.6 U1.21 | length 3895.6
  Top Layer w11.81: v1(445,1650) 445.5,1650.5 712.5,1650.5 U1.21 ; v1(455,3365) 455.11,3365.11 464.89,3365.11 465,3365 v1(1915,3365)
  Bottom Layer w11.81: v1(445,1650) 445,3346.02 455,3356.02 v1(455,3365) ; v1(1915,3365) 1915,3075 1939,3051 J5.6
RB10: J2.8 J3.3 U1.23 | length 1876.4
  Top Layer w11.81: v1(195,2760) 210,2760 211,2759 J3.3 ; J2.8 444,1846 538,1752 712,1752 U1.23
  Bottom Layer w11.81: v1(195,2760) 195,1896.06 J2.8
RB11: J3.4 U1.24 | length 1476.3
  Top Layer w11.81: J3.4 v1(881,2859)
  Bottom Layer w11.81: U1.24 904,1751 923,1770 923,2817 v1(881,2859)
RB12: J3.5 U1.27 | length 1232.2
  Bottom Layer w11.81: J3.5 576,2959 535,2918 535,2000 590,1945 707,1945 U1.27
RB13: J2.7 J4.1 U1.28 | length 6769.8
  Top Layer w11.81: J2.7 178,1746 152,1772 152,1903 180,1931 490,1931 521,1900 757,1900 808,1951 U1.28 ; v1(555,110) 605,60 2940,60 v1(2985,105)
  Bottom Layer w11.81: v1(555,110) 555,1860 595,1900 745,1900 745.11,1899.89 754.89,1899.89 806,1951 U1.28 ; v1(2985,105) 2985,1260 3005,1280 J4.1
RB14/TX: J5.5 U1.29 | length 2231.3
  Top Layer w11.81: U1.29 712,2050 650,2050 610,2090 610,2425 655,2470 1280,2470 1330,2520 1330,2700 1581,2951 J5.5
RD0/PWM: J5.8 U1.46 | length 3223.4
  Top Layer w11.81: J5.8 2137,3325 v1(2895,3325) ; U1.46 2615,1253 2898,1253 v1(2900,1255)
  Bottom Layer w11.81: v1(2895,3325) 2897.5,3322.5 2897.5,1257.5 v1(2900,1255)
RD1/LED2: R9.2 U1.49 | length 2273.7
  Top Layer w10: v1(1490,1605) 2290,1605 2440,1455 2509,1455 U1.49
  Top Layer w11.81: R9.2 1390,461.19 v1(1390,645)
  Bottom Layer w11.81: v1(1390,645) 1450,705 1450,1565 v1(1490,1605)
RD2: J4.5 U1.50 | length 707.7
  Top Layer w10: U1.50 3001,1451 3045,1495 3045,1650 3075,1680 J4.5
RD3: J4.4 U1.51 | length 1285.6
  Top Layer w10: U1.51 2518,1551 2560,1593 2567,1600 2935,1600 2990,1655 2990,1800 3035,1845 3205,1845 3250,1800 3250,1600 3230,1580 J4.4
RD4/LED1: R8.2 U1.52 | length 2696.1
  Top Layer w10: R8.2 1820,451.19 1820,270 1845,245 2210,245 2300,155 v1(2755,155)
  Bottom Layer w10: U1.52 2724,1551 2751.5,1523.5 2751.5,158.5 v1(2755,155)
RD7/RST: J5.10 U1.55 | length 2700.6
  Top Layer w10: J5.10 1163.5,3150.5 1724.5,3150.5 v1(1725,3150) ; v1(1855,1805) 2400,1805 2454.5,1750.5 2512.5,1750.5 U1.55
  Bottom Layer w10: v1(1725,3150) 1825,3150 1850,3125 1850,1810 v1(1855,1805)
RD9: J4.2 U1.43 | length 757.9
  Top Layer w10: U1.43 2526,1151 2575,1200 2960,1200 3030,1270 3030,1340.13 3069.87,1380 J4.2
RD10: J4.3 U1.44 | length 1048.2
  Top Layer w10: U1.44 2622,1160 3225,1160 3250,1185 3250,1456.72 3225.86,1480.86 3225,1480 J4.3
RD11/INT: J5.7 U1.45 | length 3149.1
  Top Layer w10: J5.7 2111,3151 2240,3280 v1(2850,3280) ; U1.45 2513,1252.14 2560.86,1300 2685,1300 2710,1325 v1(2825,1325)
  Bottom Layer w10: v1(2825,1325) 2825,1328.36 2850,1353.36 v1(2850,3280)
RF4/SDA: J5.3 U1.31 | length 1801.8
  Top Layer w11.81: U1.31 713,2313 760,2360 1390,2360 1445,2415 1445,2600 1596,2751 J5.3
RF5/SCL: J5.4 U1.32 | length 1798.9
  Top Layer w11.81: v1(815,2415) 1330,2415 1385,2470 1385,2650 1586,2851 J5.4
  Bottom Layer w11.81: U1.32 814,2152 814,2414 v1(815,2415)
RG6/SCK: J5.12 U1.4 | length 2619.3
  Bottom Layer w11.81: U1.4 1108,751 1140,783 1140,2347 1246,2453 1246,2924 1219,2951 J5.12
RG7/MISO: J5.13 U1.5 | length 2394.1
  Bottom Layer w11.81: U1.5 764,902 975.08,902 995,921.92 995,2825 1022,2852 1162,2852 J5.13
RG8/MOSI: J5.14 U1.6 | length 2223.6
  Bottom Layer w11.81: U1.6 1011,851 1035,875 1035,2730 1056,2751 J5.14
RG9/CS: J5.11 R4.2 U1.8 | length 2557.8
  Top Layer w11.81: R4.2 1016.91,3051 J5.11
  Bottom Layer w11.81: U1.8 906,951 925,970 925,1625 957.5,1657.5 957.5,3032.5 976,3051 J5.11
USB-D_N: R12.1 U1.36 | length 277.2
  Top Layer w15: U1.36 2614.04,749.96 2661.71,749.96 2721.75,810 2776,810 2800.71,785.29 2800.71,743.8 R12.1
USB-D_P: R13.1 U1.37 | length 311.5
  Top Layer w15: U1.37 2563,901 2767.84,901 2791.91,876.93 R13.1@2791.91,875
USB-DET: R11.1 U1.34 | length 224.5
  Top Layer w11.81: U1.34 2613,504.82 2664.81,453.01 R11.1
USB-ID: J1.4 U1.33 | length 1783.4
  Top Layer w11.81: U1.33 2515,649 2515,323.84 2528.84,310 3140,310 3153.37,323.37 3153.37,324.39 3165,336.02 v1(3165,345) ; J1.4 3245.5,856.5 v1(3246,857)
  Bottom Layer w11.81: v1(3165,345) 3220,345 3246,371 v1(3246,857)
USB_N: J1.2 R12.2 | length 168.5
  Top Layer w15: R12.2 2932.16,759.07 2932.16,772.16 2953.5,793.5 J1.2
USB_P: J1.3 R13.2 | length 160.2
  Top Layer w15: R13.2@2908.09,875 2913.08,875 2932.16,855.92 2932.16,850.93 2958.09,825 J1.3
VCC3_3: C9.1 C10.1 C11.1 C12.1 C14.1 C15.1 C16.1 J2.2 J3.2 J5.15 R1.1 R2.1 R4.1 R6.2 R10.1 U1.10 U1.19 U1.26 U1.35 U1.38 U1.57 U2.2 | length 11398.4
  Top Layer w10: U1.19@713,1553 760.09,1600.09 C11.1 ; U1.10 966.09,1051 C14.1 ; U1.26 C15.1@944.96,1850.96 ; R4.1 1015,2653.91 C16.1 1012.09,2651 J5.15
  Top Layer w11.81: R6.2 108,799.19 108,1224 130,1246 J2.2 ; R1.1@2122.18,715.91 2127.44,721.17 C9.1 ; C9.1@2318,715.91 2370.91,715.91 2406,751 U1.35 U1.38
  Top Layer w20: U1.19 U1.19@713,1553 ; U1.26 U1.26 ; C15.1@944.96,1850.96 C15.1 ; v1(985,595) 1070,595 1085,580 1085,498.81 R2.1 ; C12.1 1035,2193 1035,2250 1078,2293 v1(1207,2293) 1205,2291 1205,2174.5 U2.2 ; v1(1735,3505) 1878.09,3505 R10.1 ; v1(2265,1265) 2270,1265 2295,1290 2366.91,1290 C10.1
  GND Plane 2 w11.81: J3.2 J3.2@633,2655 ; 2422,1849 2424,1851
  GND Plane 2 w20: J2.2 396,1246 425,1275 425,1520 456,1551 U1.19 764,1602 995.08,1602 ; J3.2@633,2655 995.08,2655 ; U1.10 983.37,1051 ; U1.26 995.08,1851 ; v1(985,595) 983.37,596.63 983.37,1051 ; J5.15@1159,2655 995.08,2655 ; J5.15 1464,2651 1505,2692 1505,3485 1525,3505 v1(1735,3505) ; v1(1207,2293) 1205,2291 995.08,2291 ; v1(2265,1265) 2275,1275 2417,1275 2422,1270 ; 2422,1849 2422,1270 ; U1.35 2441,751 2422,770 2422,1270 ; U1.57 2424,1851 995.08,1851 ; 983.37,1051 995.08,1062.72 995.08,1602 ; 995.08,1602 995.08,1851 ; 995.08,1851 995.08,2291 ; 995.08,2291 995.08,2655
VCC5: C5.1 C7.1 C18.1 FP1.1 J5.2 R11.2 U2.1 U3.3 | length 5450.2
  Top Layer w20: U2.1 1388.28,2177.78 1388.28,2250.28 1400,2262 1525.09,2262 1531,2256.09 ; C7.1@1536,2192 1531,2197 1531,2256.09 ; U3.3 2244.91,2700 C18.1 2241.09,2700 2166,2700 2122,2656 2068,2656 J5.2 2059,2655 1615,2655 1531,2571 1531,2256.09 ; R11.2 2790,439 v1(2790,365) ; R11.2@2790,448 2889.83,448 C5.1 ; R11.2@2790,457 FP1.1
  GND Plane 1 w20: J5.2 1826,2651 1785,2610 1785,395 1815,365 v1(2790,365)
pads on no net: J1. J2.6 T1.2 T1.4 T2.2 T2.4 U1.1 U1.2 U1.3 U1.11 U1.15 U1.22 U1.30 U1.42 U1.53 U1.54 U1.60 U1.61 U1.62 U1.63 U1.64

## Polygon pours and split planes (outlines as drawn)
GND on Bottom Layer "GND_L04_P002" (solid, pour order 2): 25.17,3825 3300,3825 3300,20 35.24,20
GND on GND Plane 1 "GND_L02_P003" (solid, pour order 3): 38,3825 38,20 3300,20 3300,3825
GND on GND Plane 2 "GND_L03_P005" (solid, pour order 5): 28,3825 3300,3825 3300,25 28,25
GND on Top Layer "GND_L01_P007" (solid, remove dead copper, pour order 7): 3299.99,26.97 3299.99,3825 24.99,3825 24.99,26.97

## Silkscreen, mask and mechanical layers (free items; w line width, h text height)
Top Overlay:
  region: 1920 vertices and 34 holes, not listed, extent 2319.86,3195.72 2729.81,3550.36
  text "3V Power" at 1950,3700.92 h90
  text "RDO/PWM" at 1770,3230.61 h60
  text "RB3/AN" at 1230,3210.61 h60
  text "RDY/RST" at 1230,3130.61 h60
  text "RD11/INT" at 1790,3130.61 h60
  text "RG9/CS" at 1230,3035.61 h60
  text "RB8/RX" at 1820,3030.61 h60
  text "BootLoader Board" at 2350,3000 h45
  text "RG6/SCK" at 1230,2935.61 h60
  text "RB12" at 435,2935 h60
  text "RB14/TX" at 1800,2930.61 h60
  text "CANH" at 3135,2840.61 h60
  text "RB11" at 435,2840 h60
  text "RG7/MISO" at 1230,2835.61 h60
  text "RF5/SCL" at 1800,2830.61 h60
  text "RB10" at 435,2735.61 h60
  text "RG8/MOSI" at 1230,2735.61 h60
  text "RF4/SDA" at 1795,2730.61 h60
  text "VCC 5V" at 1825.06,2635.61 h60
  text "VCC 3V" at 380.06,2630.61 h60
  text "VCC 3V" at 1230.06,2630.61 h60
  text "CANL" at 3140,2560.61 h60
  text "GND" at 435,2540.61 h60
  text "GND" at 1235,2535.61 h60
  text "GND" at 1880,2530.61 h60
  text "RB10" at 310,1830.61 h60
  text "RB13" at 315,1735.61 h60
  text "RD2" at 3200,1660 h60
  text "N/C" at 320,1630.61 h60
  text "RD3" at 3200,1560.61 h60
  text "RB6/PGC" at 320,1530.61 h60
  text "RD10" at 3200,1460.61 h60
  text "RB7/PGD" at 320,1430.61 h60
  text "RD9" at 3200,1370.61 h60
  text "GND" at 320,1330.61 h60
  text "RB13" at 3200,1260.61 h60
  text "VCC 3V" at 310.06,1230.61 h60
  text "MCLR" at 325,1120.61 h60
  text "RESET" at 210,480.81 h80
  text "A Bjorn Board" at 2320,51.28 h60
  text "2026" at 2704.93,50.66 h60
Mechanical 1:
  the board outline again, w10

## Text inside footprints (layer, text, board x,y; h text height)
T1: Top 3D Body "*" at 2103.5,354 h50 r270; Top Overlay "*" at 2145,393 h50 r270
T2: Top 3D Body "*" at 1203.5,354 h50 r270; Top Overlay "*" at 1245,393 h50 r270
U1: Top Overlay "PIN 1" at 645,575 h25; Top Overlay "PIN 31" at 675,2210.27 h25; Top Overlay "PIN 2" at 780,575 h25; Top Overlay "PIN 33" at 2465,575.27 h25; Top Overlay "PIN 63" at 2475,2215.27 h25; Top Overlay "PIN 32" at 790,2210.27 h25; Top Overlay "PIN 64" at 2575,2215.27 h25; Top Overlay "PIN 34" at 2585,575.27 h25
U2: Top 3D Body "*" at 1395.5,2058.5 h50 r180; Top Overlay "*" at 1340,2195 h50 r180
U3: Top 3D Body "*" at 2450.5,2768.5 h50; Top 3D Body "RefDes2" at 2645,2825 h30 r180; Top Overlay "*" at 2384,2813 h50